# Altium PCB 3_Interface_QuadUART.PcbDoc (part 2 of 2)
Units mm, origin at the board's own origin, x right, y up, seen from the top; angles counter-clockwise.
Board outline 82.5 x 28 mm, 2 copper layers (Top Layer, Bottom Layer), stack 1.571 mm thick; 58 components, 30 nets, 183 pads, 28 vias.
Unrouted connection lines stored in the file: 1.
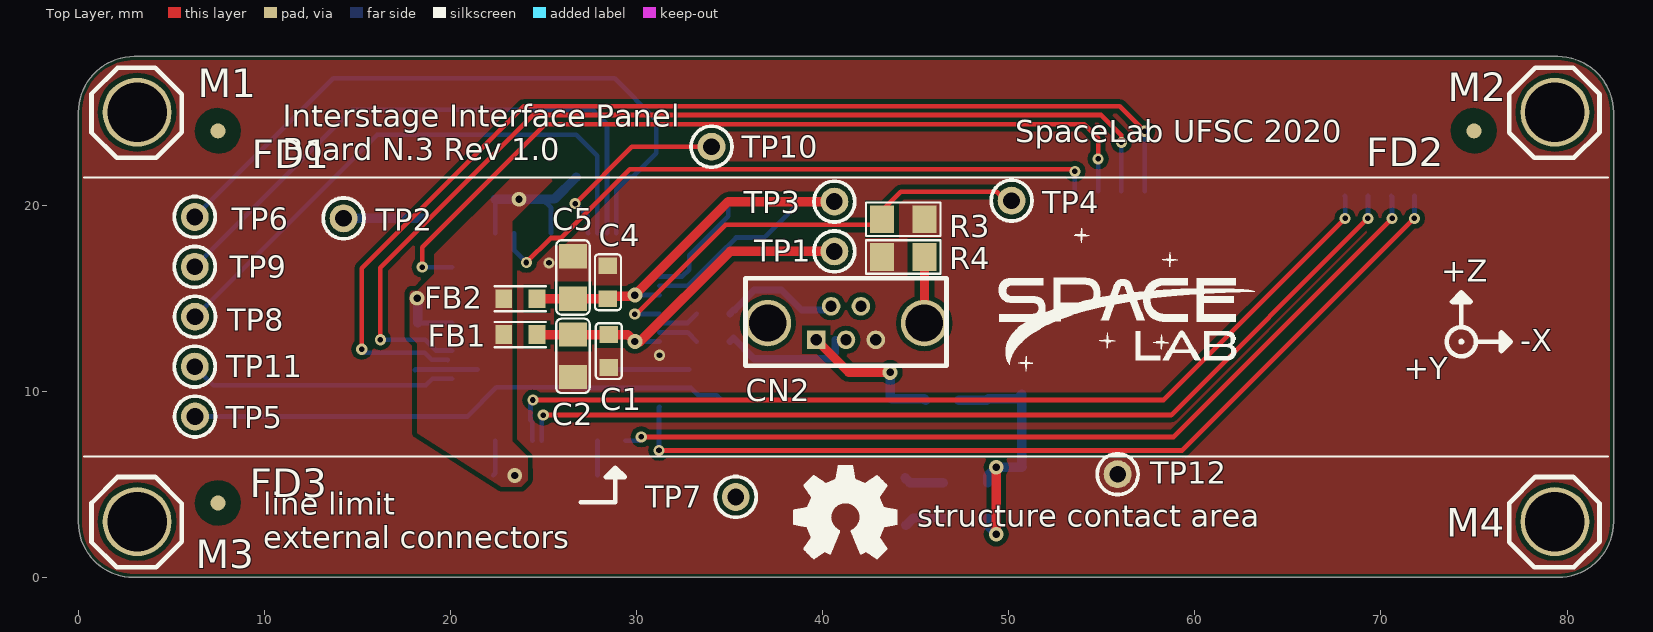
[diagram p0: Top Layer view]

## Polygon pours and split planes (outlines as drawn) (continued)
3.3V on Top Layer "3.3V_TOP" (solid, pour order 14): 23.975,5.054
3.3V on Top Layer "3.3V_TOP" (solid, pour order 6): 23.2,21.423 25.577,21.423 23.306,19.152 23.306,7.313 24.141,6.477 24.148,5.231 23.797,4.88 22.729,4.886 18.2,7.754 18.2,12.57 17.801,12.969 17.801,15.403 18.199,15.403 19.125,16.329 19.125,17.363
GND on Top Layer "Top_Layer-GND" (solid, remove dead copper, pour order 18): 0,25 cw(c3,25) 3,28 79.452,28 cw(c79.452,24.952) 82.5,24.952 82.5,3.048 cw(c79.452,3.048) 79.452,0 3.048,0 cw(c3.048,3.048) 0,3.048

## Silkscreen, mask and mechanical layers (free items; w line width, h text height)
Top Overlay:
  drawing of 1045 lines, arcs and shapes, not listed
  text "SpaceLab UFSC 2020" at 50.35,23.392 h1.2
  text "Interstage Interface Panel  / Board N.3 Rev 1.0" at 10.983,22.425 h1.2
  text "+Z" at 73.23,15.895 h1.2
  text "-X" at 77.48,12.145 h1.2
  text "+Y" at 71.23,10.645 h1.2
  text "structure contact area" at 45.071,2.724 h1.2
  text "line limit  / external connectors" at 9.925,1.575 h1.2
Bottom Overlay:
  circle w0.254: c74.325,12.65 r0.035
  circle w0.254: c74.325,12.65 r0.785
  region: 76.35,13.15 76.85,12.65 76.35,12.15
  region: 73.825,14.675 74.325,15.175 74.825,14.675
  lines w0.254: 73.825,14.8 74.325,15.3 ; 74.325,13.435 74.325,15.3 ; 74.825,14.8 74.325,15.3 ; 75.11,12.65 76.975,12.65 ; 76.475,12.15 76.975,12.65 ; 76.475,13.15 76.975,12.65
  text "Tx4" at 55.075,18.975 h0.8 r90
  text "GND" at 52.575,18.95 h0.8 r90
  text "Tx3" at 57.65,18.95 h0.8 r90
  text "Rx4" at 53.8,18.9 h0.8 r90
  text "Rx3" at 56.375,18.9 h0.8 r90
  text "Tx2" at 69.65,18.725 h0.8 r90
  text "Tx1" at 72.225,18.7 h0.8 r90
  text "Rx2" at 68.375,18.65 h0.8 r90
  text "Rx1" at 70.95,18.65 h0.8 r90
  text "GND" at 67.1,18.625 h0.8 r90
  text "+Z" at 73.235,15.875 h1.2
  text "-X" at 77.485,12.125 h1.2
  text "-Y" at 71.235,10.625 h1.2
Mechanical 1:
  lines w0.05: 0,14.006 82.5,14.006 ; 41.25,0.011 41.25,28
  lines w0.2: 0,2.962 ccw(c2.962,2.962) 2.962,0 79.515,0 ccw(c79.515,2.985) 82.5,2.985 82.5,24.998 ccw(c79.498,24.998) 79.498,28 3.225,28 2.995,28 ccw(c2.995,25.005) 0,25.005 0,23.5 0,6.5 0,2.962
Mechanical 16:
  lines w0.254: 0.427,-25.273 0.427,-5.161 138.649,-5.161 ; 0.502,-20.771 87.777,-20.771 ; 0.502,-16.009 138.649,-16.009 ; 0.552,-11.246 138.542,-11.246 ; 41.812,-25.198 41.812,-11.246 ; 87.849,-25.173 87.849,-5.211 ; 87.902,-11.161 87.902,-5.161 ; 105.374,-11.146 105.374,-5.148 ; 138.727,-25.273 -25.273,-25.273 -25.273,90.564 138.727,90.564 138.727,-25.183
  text "DATE:" at 107.527,-9.248 h1.92
  text "1.0" at 99.302,-9.323 h1.92
  text "DD/MM/2020" at 118.252,-9.323 h1.92
  text "REV:" at 90.052,-9.561 h2.41
  text "TITLE: SEMI USB N.3 BOARD" at 2.527,-9.736 h2.54
  text "Silkscreen color: white" at 43.052,-14.498 h1.92
  text "MATERIAL:" at 2.367,-14.646 h1.92
  text "FR4" at 19.194,-14.646 h1.92
  text "Project: IIP FloripaSat-2" at 89.827,-14.673 h1.92
  text "Space Technology Research Laboraty" at 89.002,-18.273 h1.45
  text "Board Thickness:" at 2.042,-19.409 h1.92
  text "Layers: 02" at 43.252,-19.423 h1.92
  text "1.6mm" at 31.927,-19.498 h1.92
  text "Federal University of Santa Catarina" at 89.152,-21.023 h1.4
  text "SpaceLab UFSC" at 89.127,-23.898 h1.4
  text "Drawing:" at 43.502,-23.948 h1.92
  text "Yan C. de Azeredo" at 58.702,-23.948 h1.73
  text "PCB Surface:" at 1.852,-24.323 h1.92
  text "HASL" at 24.677,-24.448 h1.73

## Dimensions
0,0 to 0,28 on Mechanical 2
0,28 to 82.5,28 on Mechanical 2
3.15,3 to 79.35,3 on Mechanical 2
82.2,21.5 to 82.2,6.5 on Mechanical 2
82.2,6.5 to 82.5,0 on Mechanical 2

## Text inside footprints (layer, text, board x,y; h text height)
CN1: Bottom Overlay "1" at 65.275,20 h1 r180
CN3: Bottom Overlay "1" at 50.775,20.256 h1 r180